# Altium PCB NanoEEG_v2_MCU.PcbDoc (part 2 of 2)
Units mil, origin at the board's own origin, x right, y up, seen from the top; angles counter-clockwise.
Board outline 2598.43 x 2047.24 mil, 4 copper layers (Top Layer, Gound Plane 1, Power Layer 1, Bottom Layer), stack 73.627 mil thick; 74 components, 82 nets, 371 pads, 188 vias.
Unrouted connection lines stored in the file: 22.
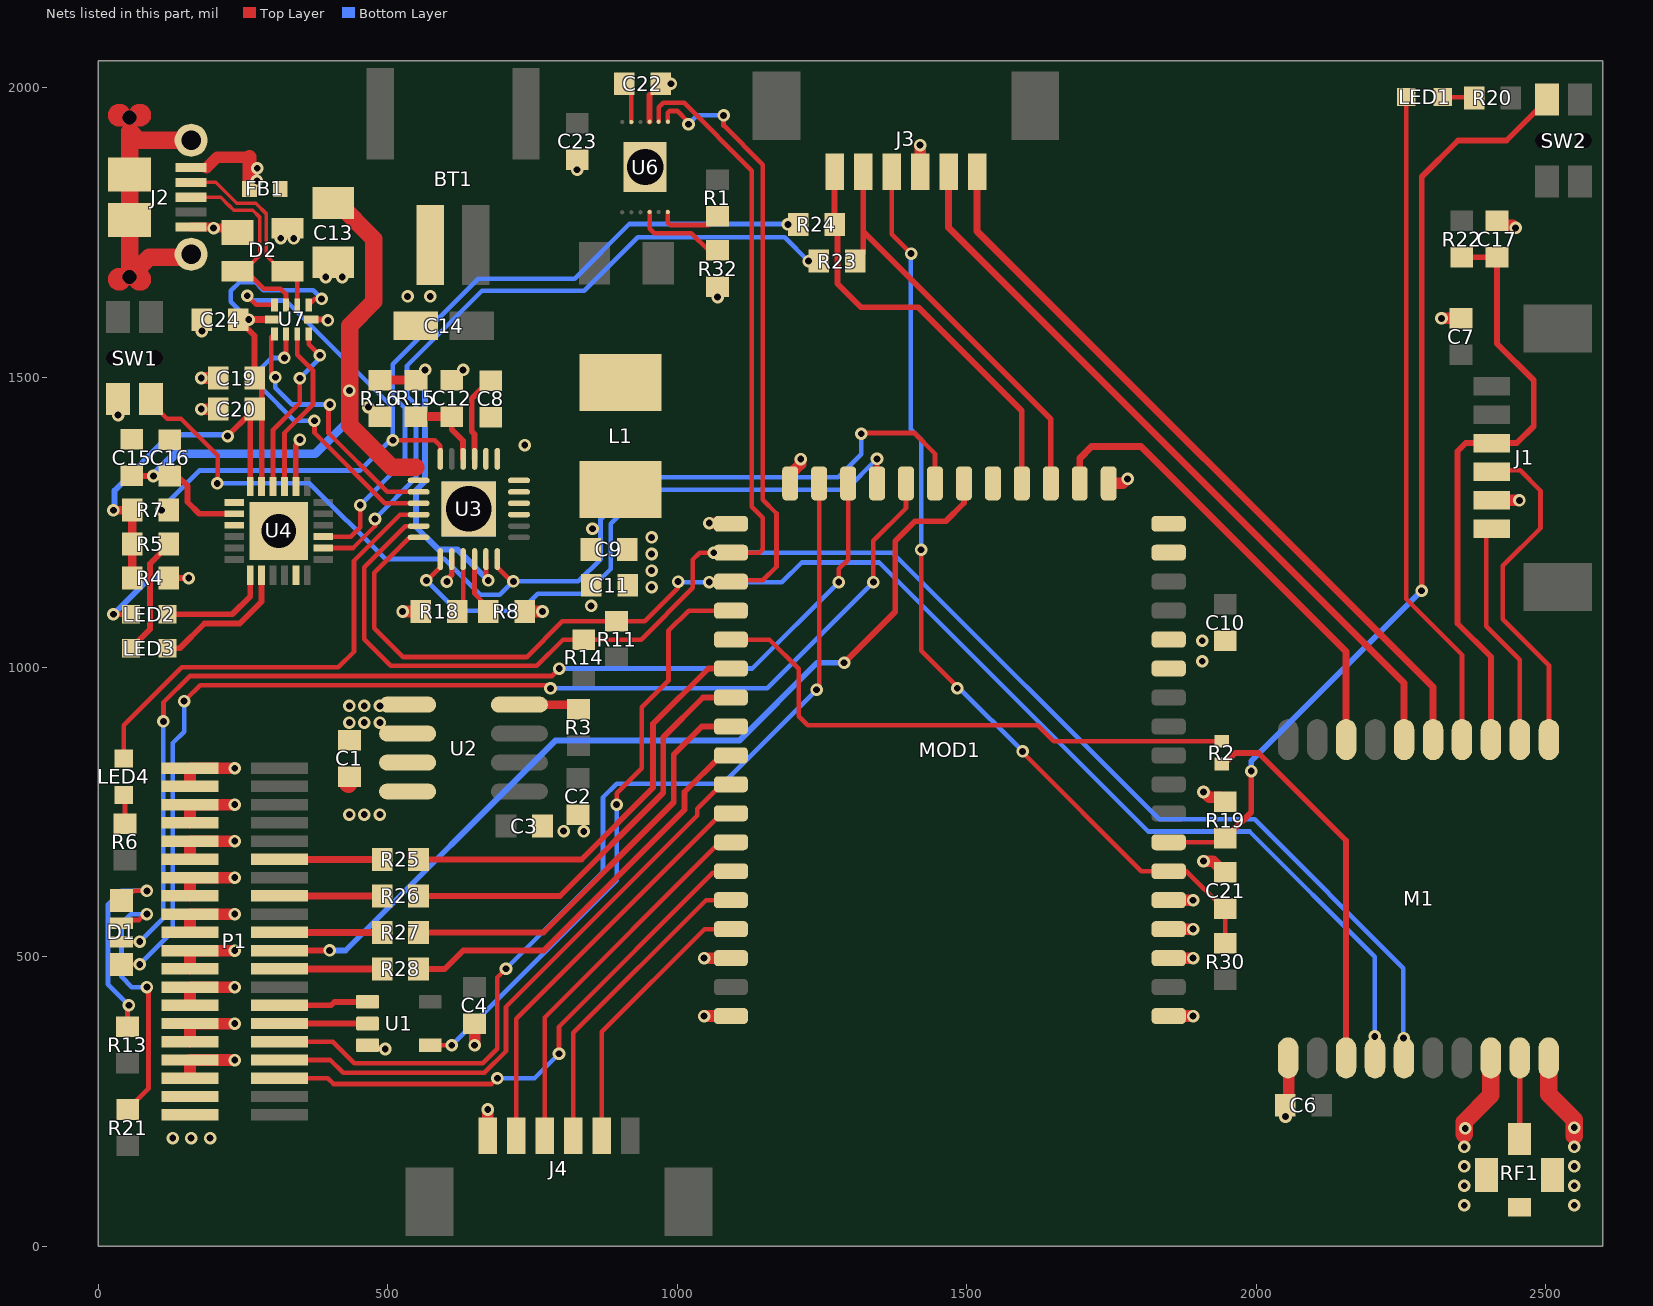
[diagram p4: the nets of this part, all layers, seen from the top]

## Via types
v1: diameter 21.65, hole 11.81, Top Layer to Bottom Layer, tented both sides, 182 vias
v2: diameter 157.48, hole 78.74, Top Layer to Bottom Layer, 3 vias
v3: diameter 78.74, hole 59.06, Top Layer to Bottom Layer, tented both sides, 1 vias
v4: diameter 59.06, hole 51.18, Top Layer to Bottom Layer, tented both sides, 1 vias
v5: diameter 47.24, hole 35.43, Top Layer to Bottom Layer, tented both sides, 1 vias

## Nets (pads, with @x,y where several pads share a name; then routed paths per layer and width w, separated by ;. In a path a pad name is that pad's centre, name@x,y a point inside that pad or via, vN(x,y) a via of type N, cw(c..) or ccw(c..) an arc to the next point about the centre after c; other vN are vias at no path point) (continued)
BQ_CHARGE_STAT: LED4.1 U3.4 | length 809
  Top Layer w8: LED4.1@44.67,842.11 44.67,899.51 144.64,999.48 414.89,999.48 442.06,1026.66 442.06,1183.67 521.48,1263.08 U3.4@553.72,1263.08
BQ_D+: U3.2 U7.1 | length 450.3
  Top Layer w8: U7.1@304.9,1575.02 299.29,1569.42 299.29,1507.33 v1(306.37,1500.25) ; v1@397.95,1452.36 397.95,1404 499.51,1302.45 U3.2@553.72,1302.45
  Bottom Layer w8: v1(306.37,1500.25) 306.37,1482.25 335.46,1453.16 v1(400.39,1453.16)
BQ_D-: U3.3 U7.2 | length 489.5
  Top Layer w8: v1(321.74,1533.62) 324.58,1536.46 U7.2@324.58,1575.02 ; v1@373.77,1424.93 373.77,1404.36 495.38,1282.76 U3.3@553.72,1282.76
  Bottom Layer w8: v1(321.74,1533.62) 299.49,1533.62 282.3,1516.43 282.3,1481.85 338.98,1425.17 v1(373.73,1425.17)
BQ_DSEL: R7.2 U3.24 U7.9 | length 1005.1
  Top Layer w8: v1(257.82,1640.92) 273.53,1625.22 U7.9@304.9,1625.22 ; v1(509.22,1391.65) 581.36,1391.65 591.12,1381.89 U3.24@591.12,1359.54
  Top Layer w10: R7.2@121.9,1269.05 R7.2@121.9,1271.02
  Bottom Layer w8: v1@108.03,1272.15 175.08,1339.2 452.25,1339.2 503.8,1390.76 503.8,1388.73 506.72,1391.65 v1(509.22,1391.65) 509.22,1448.11 324.6,1632.73 266.01,1632.73 v1(257.82,1640.92)
  other v1: 109.53,1270.66
BQ_INT: MOD1.27 U3.7 | length 1045.9
  Top Layer w8: v1(567.01,1149.51) 568.2,1149.51 591.12,1172.42 U3.7@591.12,1186.31 ; v1(1345.08,1359.35) 1345.08,1321.32 1343.01,1319.25 MOD1.27@1345.22,1317.04
  Bottom Layer w8: v1(567.01,1149.51) 619.41,1097.11 729.65,1097.11 759.28,1126.74 842.52,1126.74 885.08,1169.3 885.08,1247.65 943.46,1306.03 1291.75,1306.03 v1(1345.08,1359.35)
BQ_nCE: R18.1 U3.9 | length 94.6
  Top Layer w8: R18.1@620.47,1095.87 630.49,1105.89 U3.9@630.49,1186.31
BQ_nQON: MOD1.25 SW1.1' U3.12 | length 1823.6
  Top Layer w8: SW1.1'@91.79,1462.51 95.65,1462.51 99.25,1458.9 99.25,1448.82 119.17,1428.9 143.27,1428.9 206.96,1365.21 v1@206.96,1317.01 ; U3.12@689.54,1186.31 689.54,1171.89 713.67,1147.77 v1(717.2,1147.77) ; v1@1317.44,1404.15 1409.41,1404.15 1445.22,1368.34 MOD1.25@1445.22,1317.04
  Bottom Layer w8: v1@205.98,1317.49 365.11,1317.49 496.01,1186.6 597.76,1186.6 659.83,1124.53 693.96,1124.53 v1(717.2,1147.77) 829.33,1147.77 867.76,1186.2 867.76,1255.24 940.41,1327.89 1278.14,1327.89 1317.8,1367.55 v1(1317.8,1402.72)
  other v1: 205.98,1317.01
BQ_REGN: C12.1 R15.1 U3.22 | length 143.1
  Top Layer w10: C12.1@610.8,1432.42 610.8,1409.99 630.21,1390.58 630.21,1359.81 U3.22@630.49,1359.54
  Top Layer w16: R15.1@548.74,1432.42 C12.1@610.8,1432.42
CBS_ACCEL: MOD1.17
CC1310_nRESET: C17.2 J1.4 M1.3 R22.1 | length 1049.4
  Top Layer w10: R22.1@2354.81,1707.43 C17.2@2415.41,1707.43 2415.41,1558.66 2478.94,1495.13 2478.94,1415.82 2449.72,1386.61 2361.84,1386.61 2347.64,1372.41 2347.64,1075.28 2405.17,1017.74 M1.3@2405.17,874.61
CC1310_Sync_PWM: MOD1.35 R2.2 | length 986.6
  Top Layer w8: MOD1.35@1074.2,1047.36 MOD1.35@1092.85,1047.36 1159.46,1047.36 1209.86,996.95 1209.86,915.29 1225.82,899.34 1622.8,899.34 1650.22,871.92 R2.2@1940.26,871.92
CC1310_TCKC: J1.1 M1.2 | length 391.4
  Top Layer w8: J1.1@2406.28,1238.37 2397.34,1229.43 2397.34,1070.52 2455.17,1012.68 M1.2@2455.17,874.61
CC1310_TMSC: J1.3 M1.1 | length 593.3
  Top Layer w8: J1.3@2406.28,1336.79 2406.28,1338.62 2405.12,1339.78 2455.45,1339.78 2490.73,1304.5 2490.73,1239.65 2425.87,1174.8 2425.87,1082.45 2505.32,1003 M1.1@2505.32,874.61
CC1310_UART_RX: J3.1 M1.5 | length 1306.2
  Top Layer w12: J3.1@1518.03,1854.76 1518.03,1752.47 2305.17,965.32 M1.5@2305.17,874.61
CC1310_UART_TX: J3.2 M1.6 | length 1305.9
  Top Layer w12: J3.2@1468.82,1854.76 1468.82,1758.63 2255.17,972.27 M1.6@2255.17,874.61
CC1310_WAKEUP: M1.8 MOD1.20 | length 810.2
  Top Layer w12: MOD1.20@1695.22,1317.04 1695.22,1360.13 1715.73,1380.65 1801.08,1380.65 2155.17,1026.56 M1.8@2155.17,874.61
CC3235_JTAG_TCK: J4.4 MOD1.44 | length 544.8
  Top Layer w8: J4.4@820.6,190.54 820.6,368.18 1049.79,597.36 MOD1.44@1092.85,597.36
CC3235_JTAG_TDI: J4.2 MOD1.41 | length 719.6
  Top Layer w8: J4.2@722.18,190.54 722.18,392.43 1077.11,747.36 MOD1.41@1092.85,747.36
CC3235_JTAG_TDO: J4.3 MOD1.42 | length 651.1
  Top Layer w8: J4.3@771.39,190.54 771.39,394.84 1072.96,696.41 1091.9,696.41 MOD1.42@1092.85,697.36
CC3235_JTAG_TMS: J4.5 MOD1.45 | length 475.9
  Top Layer w8: J4.5@869.82,190.54 869.82,369.92 1047.26,547.36 MOD1.45@1092.85,547.36
CC3235_MODE02: MOD1.7 R19.2 SW2.1' | length 1658.7
  Top Layer w8: MOD1.7@1848.76,697.36 1939.66,697.36 R19.2@1946.54,704.24
  Top Layer w10: R19.2@1946.54,704.24 1991.41,749.12 v1(1991.41,820.31) ; v1@2284.95,1131.51 2285.54,1132.1 2285.54,1846.4 2348.23,1909.1 2432.03,1909.1 SW2.1'@2502.85,1979.92 ; SW2.1'@2502.05,1979.92 SW2.1'@2502.85,1979.92 ; SW2.1'@2504.1,1981.17 SW2.1'@2502.85,1979.92
  Bottom Layer w10: v1(1991.41,820.31) 1991.41,837.62 v1(2285.42,1131.62)
CC3235_nRST: C21.2 J3.4 MOD1.6 R30.1 | length 1620.5
  Top Layer w8: J3.4@1370.39,1854.76 1370.39,1747.45 v1(1404.09,1713.75) ; v1(1421.23,1202.55) 1421.23,1028.23 1483.62,965.84 v1(1483.62,963.43) ; v1(1596.5,854.34) 1596.5,852.44 1801.59,647.36 MOD1.6@1848.76,647.36 1879.43,647.36 1944.57,582.22 C21.2@1946.54,582.22 R30.1@1946.54,522.69
  Bottom Layer w8: v1(1404.09,1713.75) 1403.12,1712.77 1403.12,1410.85 1421.23,1392.74 v1(1421.23,1202.55) ; v1(1483.62,963.43) 1487.41,963.43 v1(1596.5,854.34)
CC3235_UART_RX: J3.6 MOD1.22 R24.1 | length 729.6
  Top Layer w10: J3.6@1271.97,1854.76 R24.1@1271.95,1764.12 1276.65,1759.41 1276.65,1662.28 1317.58,1621.36 1416.46,1621.36 1595.22,1442.6 MOD1.22@1595.22,1317.04
CC3235_UART_TX: J3.5 MOD1.21 R23.1 | length 735.6
  Top Layer w10: R23.1@1307.71,1700.99 1321.18,1714.46 1321.18,1752.13 ; J3.5@1316.25,1849.83 J3.5@1321.18,1854.76 1321.18,1752.13 ; MOD1.21@1645.22,1317.04 1645.22,1428.1 1321.18,1752.13
CoP_LED1: LED1.1 M1.4 | length 1149.2
  Top Layer w8: LED1.1@2259.14,1984.05 2259.14,1117.44 2355.17,1021.41 M1.4@2355.17,874.61
CP2102_RXD: R23.2 U4.20 | length 1205.4
  Top Layer w8: U4.20@404.62,1205.47 440.33,1205.47 478.29,1243.43 v1(478.29,1255.55)
  Bottom Layer w8: v1(478.29,1255.55) 478.29,1256.34 549.02,1327.06 549.02,1453.04 533.51,1468.54 533.51,1520.11 663.11,1649.71 839.78,1649.71 932.3,1742.23 1185.51,1742.23 v1@1227.64,1700.11
  other v1: 1227,1700.99
CP2102_RXT: LED2.1 U4.13 | length 176.3
  Top Layer w10: LED2.1@119.93,1091 231.93,1091 262.89,1121.96 U4.13@262.89,1142.48
CP2102_SUSPEND: U4.17
CP2102_TXD: R24.2 U4.21 | length 1170.3
  Top Layer w8: U4.21@404.62,1225.15 436.45,1225.15 452.75,1241.45 v1(452.75,1279.46)
  Bottom Layer w8: v1(452.75,1279.46) 530.05,1356.76 530.05,1447.09 509.22,1467.91 509.22,1522.84 656.93,1670.55 823.02,1670.55 917.35,1764.88 1200.46,1764.88 v1@1201.82,1763.52
  other v1: 1191.24,1764.12
CP2102_TXT: LED3.1 U4.14 | length 225.7
  Top Layer w10: LED3.1@119.93,1032.31 140.99,1032.31 183.69,1075 244.87,1075 282.5,1112.62 282.5,1142.4 U4.14@282.57,1142.48
CP2102_VDD: C19.2 C20.2 C24.2 R4.2 R5.2 R7.1 U4.5 U4.6 U7.6 U7.10 | length 1212.4
  Top Layer w8: U7.6@363.95,1628.84 U7.6@363.95,1625.22 374.26,1635.53 384.41,1635.53 v1(386.08,1635.53)
  Top Layer w10: v1(223.65,1398.73) 223.76,1398.73 C20.2@262.89,1437.86 ; C24.2@242.5,1599.75 270.31,1571.94 C19.2@270.31,1499.01 282.57,1486.74 U4.5@282.57,1327.52 ; U4.6@262.89,1327.52 C20.2@262.89,1437.86 ; C20.2@270.31,1445.28 C20.2@262.89,1437.86
  Top Layer w12: C24.2@242.5,1599.75 v1(260.21,1599.75) 300.2,1599.75 U7.10@300.57,1600.12
  Top Layer w15: v1(26.55,1270.66) 26.73,1270.84 58.37,1270.84 58.91,1270.3 R5.2@58.91,1212.33 R4.2@58.91,1153.63
  Bottom Layer w8: v1(260.21,1599.75) 229.27,1630.7 229.27,1649.57 244.48,1664.77 271.09,1664.77 285.57,1650.29 371.32,1650.29 v1(386.08,1635.53)
  Bottom Layer w10: v1@28.72,1269.79 28.72,1304.92 124.7,1400.9 v1@223.22,1400.9
  Bottom Layer w15: v1(26.55,1270.66) 27.86,1270.66 v1@28.72,1269.79
CP_D+: U4.3 U7.3 | length 279.2
  Top Layer w8: U4.3@321.94,1327.52 321.94,1404.05 371.31,1453.42 371.31,1511.91 344.27,1538.96 U7.3@344.27,1575.02
CP_D-: U4.4 U7.4 | length 289
  Top Layer w8: U4.4@302.26,1327.52 302.26,1409.56 348.62,1455.93 v1(348.62,1498.58) ; U7.4@363.95,1575.02 363.95,1557.57 v1(383.21,1538.31)
  Bottom Layer w8: v1(348.62,1498.58) 383.21,1533.16 v1(383.21,1538.31)
CSB_GYRO: MOD1.18
D+: D2.2 J2.3 U7.8 | length 356.2
  Top Layer w6: J2.3@160.81,1811.13 211.68,1811.13 225.12,1797.69 225.31,1797.69 234.43,1788.56 267.43,1788.56 278.91,1777.08 278.91,1710.57 D2.2@251.52,1683.18 ; D2.2@240.86,1683.18 D2.2@251.52,1683.18 ; D2.2@256.13,1683.18 D2.2@251.52,1683.18
  Top Layer w8: D2.2@256.13,1683.18 285.85,1653.45 315.09,1653.45 324.58,1643.96 U7.8@324.58,1625.22
D-: D2.3 J2.2 U7.7 | length 337.6
  Top Layer w6: J2.2@160.81,1836.72 203.25,1836.72 239.4,1800.56 272.62,1800.56 290.91,1782.27 290.91,1709.89 D2.3@317.63,1683.18
  Top Layer w8: D2.3@317.63,1683.18 D2.3@327.47,1683.18 344.27,1666.38 U7.7@344.27,1625.22
GND: BT1.2 C1.1 C2.1 C3.1 C4.1 C6.1 C7.1 C9.1 C10.1 C11.1 C12.2 C13.2 C14.2 C15.2 C16.2 C17.1 C19.1 C20.1 C21.1 C22.1 C23.1 C24.1 D2.1 J1.2 J2.5 J2.6 J2.7 J2.8 J2.9 J2.10 J2.11 J3.3 J4.1 M1.11 M1.18 M1.20 MOD1.1 MOD1.3 MOD1.4 MOD1.5 MOD1.13 MOD1.14 MOD1.19 MOD1.30 MOD1.31 MOD1.46 MOD1.48 P1.5 P1.7 P1.9 P1.11 P1.13 P1.15 P1.17 P1.19 P1.21 P1.23 P1.25 P1.27 P1.29 P1.31 P1.33 P1.35 P1.37 P1.39 R8.1 R16.2 R18.2 R19.1 R32.2 RF1.2 RF1.3 RF1.4 SW1.2' U1.3 U2.1 U2.2 U3.8 U3.17 U3.18 U3.25 U4.2 U4.25 U6.3 U6.13 U7.5 | length 3077.3
  Top Layer w10: 54.51,1924.79 J2.8@54.51,1948.93 ; J2.11@62.62,1671.53 J2.11@62.62,1681.44 ; J2.6@153.68,1916.68 J2.6@160.81,1909.56 ; J2.7@160.81,1712.7 J2.7@164.72,1712.7 ; J2.5@160.81,1759.95 J2.5@161.02,1759.95 ; U4.2@341.63,1327.52 341.63,1382.63 348.63,1389.64 v1(348.63,1392.79) ; U7.5@368.28,1600.12 395.49,1600.12 v1(397.09,1598.53) ; U1.3@469.29,346.97 473.59,342.66 493.7,342.66 v1(495.93,340.43) ; v1(602.44,1147.56) 602.44,1150.72 610.8,1159.08 U3.8@610.8,1186.31 ; U6.3@952.4,1941.52 952.4,1987.89 C22.1@971.56,2007.04 ; M1.11@2055,325 2055,307.36 M1.11@2055.72,306.64
  Top Layer w16: J2.5@161.02,1759.95 161.14,1759.82 197.73,1759.82 v1(199.57,1757.98) 232.98,1757.98 D2.1@240.86,1750.11
  Top Layer w20: P1.5@158.86,289.88 P1.7@158.86,321.38 ; P1.9@158.86,352.87 P1.11@158.86,384.37 ; P1.13@158.86,415.86 P1.15@158.86,447.36 ; P1.17@158.86,478.86 P1.19@158.86,510.35 ; P1.21@158.86,541.85 P1.23@158.86,573.34 ; P1.25@158.86,604.84 P1.27@158.86,636.34 ; P1.29@158.86,667.83 P1.31@158.86,699.33 v1(236.22,699.32) ; P1.33@158.86,730.82 P1.35@158.86,762.32 v1(236.22,762.31) ; P1.37@158.86,793.82 P1.39@158.86,825.31 v1(236.22,825.31) ; P1.7@158.86,321.38 v1@236.2,321.35 ; P1.11@158.86,384.37 v1@236.2,384.35 ; P1.15@158.86,447.36 v1@236.2,447.34 ; P1.19@158.86,510.35 v1@236.21,510.34 ; P1.23@158.86,573.34 v1@236.21,573.33 ; P1.27@158.87,636.33 v1(236.22,636.32) ; v1(178.31,1445.28) C20.1@207.31,1445.28 ; v1(178.31,1499.01) C19.1@207.31,1499.01 ; v1(525.88,1095.87) R18.2@557.48,1095.87 ; v1(650.17,346.97) C4.1@650.17,384.37 ; J4.1@672.97,190.54 v1(672.97,235.96) ; R8.1@736.79,1095.87 v1(767.5,1095.87) ; v1(1046.54,397.36) MOD1.48@1092.85,397.36 ; v1(1046.54,497.36) MOD1.46@1092.85,497.36 ; v1(1055.53,1248.47) 1055.85,1248.16 1092.06,1248.16 MOD1.31@1092.85,1247.36 ; MOD1.30@1195.22,1317.04 1195.22,1332.79 1213.03,1350.6 1213.03,1358.81 v1(1213.34,1359.13) ; J3.3@1419.61,1854.76 v1(1419.61,1901.07) ; MOD1.19@1745.22,1317.04 1769.72,1317.04 1777.38,1324.7 v1(1777.83,1324.7) ; MOD1.1@1848.76,397.36 v1(1890.95,397.36) ; MOD1.3@1848.76,497.36 v1(1890.95,497.36) ; MOD1.4@1848.76,547.36 v1(1890.95,547.36) ; MOD1.5@1848.76,597.36 v1(1890.95,597.36) ; v1(1908.86,664.85) 1909.17,664.53 1925.25,664.53 1942.42,647.36 1944.39,647.36 C21.1@1946.54,645.21 ; v1(1908.86,784.14) 1909.3,784.14 1918.5,774.95 1938.82,774.95 R19.1@1946.54,767.23 ; C6.1@2050.42,243.35 2055.72,248.65 M1.11@2055.72,306.64 ; v1(2319.82,1601.91) C7.1@2353.74,1601.91 ; J1.2@2406.28,1287.58 v1(2454.39,1287.58) ; C17.1@2415.41,1770.43 2423.53,1770.43 2423.53,1764.27 2425.1,1762.71 2442.62,1762.71 2447.25,1758.08 v1(2447.7,1758.08) v1@2448.02,1757.76
  Top Layer w30: J2.7@160.81,1712.7 155.62,1707.52 88.7,1707.52 62.62,1681.44 J2.11@54.51,1673.33 J2.10@54.51,1771.76 J2.9@54.51,1850.5 54.51,1924.79 69.74,1909.56 J2.6@160.81,1909.56 ; v1@2359.02,193.27 2359.02,214.38 2405,260.36 M1.18@2405,325 ; M1.20@2504.93,325 2504.93,262.42 2549.33,218.02 2549.33,190.29
  other v1: 2359.19,70.74 2548.92,70.74 2359.19,104.24 2548.92,104.24 2359.19,137.75 2548.92,137.75 2359.19,171.25 2548.92,171.25 2360.82,203.43 2548.92,204.76 2050.42,223.67 236.22,321.33 236.22,384.33 236.22,447.33 236.22,510.32 236.22,573.32 838.67,716.05 803.88,716.57 434.21,904.07 459.84,904.07 486.68,904.07 434.21,932.91 459.84,932.91 486.67,932.91 1906.83,1009.96 1906.83,1045.24 851.49,1105.55 853.85,1238.67 736.79,1383.27 34.7,1434.95 466.98,1448.83 630.49,1513.1 179.5,1580.07 1069.94,1638.69 534.66,1640.02 573.79,1640.02 393.37,1673.33 421.62,1673.33 827.36,1858.52 989.27,2007.04
  other v3: 312.1,1235
I2C_SCL_B: M1.15 MOD1.32 R14.2 U3.5 U6.2 | length 3572.8
  Top Layer w8: U3.5@553.72,1243.39 553.44,1243.12 530.4,1243.12 459.84,1172.56 459.84,1047.77 505.47,1002.14 757.67,1002.14 802.89,1047.36 R14.2@838.67,1047.36 937.87,1047.36 1027.22,1136.7 1027.22,1185.7 1038.88,1197.36 v1(1063.33,1197.36) MOD1.32@1092.85,1197.36 1142.18,1197.36 1147.97,1203.15 1147.97,1258 1129.06,1276.91 1129.06,1857.11 1012.04,1974.14 976.1,1974.14 968.15,1966.19 U6.2@968.15,1941.52
  Bottom Layer w8: v1(1063.33,1197.36) 1371.87,1197.36 1832.15,737.08 1997.05,737.08 2254,480.14 v1@2254,361.25
  other v1: 2254.48,359.33
I2C_SDA_B: M1.14 MOD1.33 R11.2 U3.6 U6.1 | length 3518.6
  Top Layer w8: U3.6@553.72,1223.71 538.37,1223.71 477.21,1162.55 477.21,1067.12 527.15,1017.18 740.13,1017.18 801.81,1078.86 R11.2@895.53,1078.86 943.93,1078.86 1000.97,1135.9 v1@1000.97,1147.36 ; U6.1@983.9,1941.52 983.9,1956.93 987.11,1960.14 999.83,1960.14 1019.63,1940.34 v1(1019.63,1937.1) ; v1@1052.74,1143.72 v1@1055.4,1141.07 ; v1(1055.53,1146.51) 1092.85,1146.51 1095.85,1149.51 1147.97,1149.51 1171.57,1173.11 1171.57,1265.02 1147.97,1288.63 1147.97,1867.29 1080.15,1935.12 v1(1080.15,1952.53)
  Bottom Layer w8: v1(1001.63,1147.36) 1002.48,1146.51 v1(1055.53,1146.51) 1055.98,1146.05 1180.75,1146.05 1215.14,1180.44 1348.86,1180.44 1813.3,716 1988.24,716 2204.64,499.59 v1(2204.64,362.09) ; v1(1019.63,1937.1) 1035.06,1952.53 v1(1080.15,1952.53)
INT2_ACCEL: MOD1.23
MOD1_NDRDY: P1.12 U1.2 | length 155.7
  Top Layer w10: P1.12@313.58,384.37 U1.2@469.29,384.37
Mod2_nCS: MOD1.24 P1.20 | length 1607.3
  Top Layer w10: P1.20@313.58,510.35 399.6,510.35 v1(399.86,510.61) ; v1(1288.36,1007.23) 1376.53,1095.39 1376.53,1217.79 1410.56,1251.82 1463.9,1251.82 1495.22,1283.14 MOD1.24@1495.22,1317.04
  Bottom Layer w10: v1(399.86,510.61) 427.34,510.61 789.6,872.87 1107.09,872.87 1241.45,1007.23 v1(1288.36,1007.23)
MOD2_NDRDY: P1.14 U1.1 | length 158.1
  Top Layer w10: P1.14@313.58,415.86 402.33,415.86 408.23,421.77 U1.1@469.29,421.77
MOD_MISO: P1.26 R26.2 | length 178.7
  Top Layer w12: P1.26@314.9,603.52 P1.26@313.58,604.84 490.33,604.84 R26.2@490.43,604.74
MOD_MOSI: P1.22 R27.2 | length 177.4
  Top Layer w12: P1.22@313.9,542.17 P1.22@313.58,541.85 490.24,541.85 R27.2@490.43,541.66
MOD_NCS: P1.18 R28.2 | length 177.2
  Top Layer w12: P1.18@313.73,478.71 P1.18@313.58,478.86 490.14,478.86 R28.2@490.43,478.57
Mod_nDRDY: MOD1.34 U1.4 | length 1064.8
  Top Layer w8: U1.4@569.68,346.97 576.51,353.79 U1.4@587.99,353.79 ; U1.4@585.75,346.97 U1.4@573.62,346.97 573.7,346.89 610.72,346.89 v1(610.8,346.81) ; v1(895.53,762.32) 895.53,781.72 939.12,825.31 939.12,930.21 984.98,976.07 984.98,1062.49 1019.85,1097.36 1072.67,1097.36 1074.16,1095.87 1075.65,1097.36 MOD1.34@1092.85,1097.36
  Bottom Layer w8: v1(610.8,346.81) 895.53,631.53 v1(895.53,762.32)
MOD_NPWDN: MOD1.40 P1.8 | length 1046.7
  Top Layer w8: P1.8@313.58,321.38 401.18,321.38 423.42,299.13 667.3,299.13 704.51,336.34 704.51,413.13 1034.95,743.56 1034.95,755.2 1077.11,797.36 MOD1.40@1092.85,797.36
MOD_NRESET: MOD1.43 P1.6 | length 964.6
  Top Layer w8: P1.6@313.58,289.88 396.86,289.88 406.67,280.07 679.73,280.07 v1(689.54,289.88) ; v1(796,332.17) 796,379.04 1061.54,644.58 1072.76,644.58 1072.76,647.36 MOD1.43@1092.85,647.36
  Bottom Layer w8: v1(689.54,289.88) 753.71,289.88 v1(796,332.17)
MOD_SCLK: P1.30 R25.2 | length 177
  Top Layer w12: P1.30@313.67,667.92 P1.30@313.58,667.83 R25.2@490.43,667.83
MOD_START: MOD1.29 P1.10 | length 1714.9
  Top Layer w8: P1.10@313.58,352.87 405.69,352.87 442.68,315.88 664.25,315.88 689.54,341.17 689.54,463.89 702.55,476.9 v1@702.55,478.86 ; v1@1241.77,959.78 1245.22,963.22 MOD1.29@1245.22,1317.04
  Bottom Layer w8: v1(704.51,478.86) 872,646.35 872,775.02 895.53,798.54 1078.83,798.54 v1(1240.92,960.63)
NetC8_1: C8.1 U3.21 | length 151.9
  Top Layer w10: U3.21@650.17,1359.54 650.17,1401.79 645.2,1406.77 645.2,1463.67 676.12,1494.59 C8.1@678.08,1494.59
NetC8_2: C8.2 L1.1 U3.19 U3.20 | length 11.6
  Top Layer w10: C8.2@669.86,1423.37 C8.2@678.08,1431.6
NetC22_2: C22.2 U6.5 | length 71
  Top Layer w8: C22.2@908.57,2007.04 920.91,1994.7 U6.5@920.91,1941.11
NetD1_2: D1.2 R21.2 | length 475.5
  Top Layer w8: D1.2@40.41,557.41 46.25,563.25 70.78,563.25 80.85,573.32 v1(84.54,573.32) ; D1.2@50.73,557.87 D1.2@52.35,556.26 ; R21.2@51.34,235.96 53.31,235.96 67.02,249.68 67.02,251.65 87.12,271.74 87.12,444.75 v1(84.54,447.33)
  Bottom Layer w8: v1(84.54,447.33) 58.57,447.33 40.68,465.22 40.68,557.74 56.26,573.32 v1(84.54,573.32)
NetD1_4: D1.4 R13.2 | length 355.4
  Top Layer w8: D1.4@40.41,596.78 56.1,612.46 60.71,612.46 61.72,613.47 v1(84.54,613.47) ; R13.2@50.73,378.99 R13.2@50.84,378.88 50.84,413.4 v1(53.31,415.86)
  Bottom Layer w8: v1(53.31,415.86) 17.18,451.99 17.18,589.98 40.68,613.47 v1(84.54,613.47)
NetIC?_12: 
NetLED1_2: LED1.2 R20.1 | length 54.7
  Top Layer w8: LED1.2@2322.13,1984.05 2374.84,1984.05 R20.1@2376.25,1982.64
NetLED2_2: LED2.2 R4.1 | length 221.5
  Top Layer w10: v1(26.55,1091) LED2.2@56.94,1091 ; R4.1@121.9,1153.63 v1(156.83,1153.63)
  Bottom Layer w10: v1(26.55,1091) 89.18,1153.63 v1(156.83,1153.63)
NetLED3_2: LED3.2 R5.1 | length 206.9
  Top Layer w10: LED3.2@56.94,1032.31 89.86,1065.23 89.86,1178.32 121.9,1210.36 R5.1@121.9,1212.33
NetLED4_2: LED4.2 R6.1 | length 52.4
  Top Layer w8: R6.1@44.67,729.55 R6.1@46.63,729.55 46.63,777.15 LED4.2@44.67,779.12
NetM1_13: M1.13 R2.1 | length 660.8
  Top Layer w10: R2.1@1940.26,832.55 1944.99,832.55 1964.07,851.63 2003.97,851.63 2155,700.6 M1.13@2155,325
NetM1_19: M1.19 RF1.1 | length 157
  Top Layer w10: RF1.1@2454.39,184.98 2455,185.59 M1.19@2455,325
  Top Layer w14: RF1.1@2454.39,168.26 RF1.1@2454.39,184.98
NetMOD1_36: MOD1.36 R25.1 | length 740.6
  Top Layer w10: R25.1@553.42,667.83 834.95,667.83 958.52,791.4 958.52,901.86 1054.02,997.36 MOD1.36@1092.85,997.36
NetMOD1_37: MOD1.37 R26.1 | length 737.6
  Top Layer w10: R26.1@553.42,604.74 797.89,604.74 976.01,782.86 976.01,878.92 1044.44,947.36 MOD1.37@1092.85,947.36
NetMOD1_38: MOD1.38 R27.1 | length 735.2
  Top Layer w10: R27.1@553.42,541.66 769.36,541.66 993.99,766.3 993.99,849.01 1042.34,897.36 MOD1.38@1092.85,897.36
NetMOD1_39: MOD1.39 R28.1 | length 710
  Top Layer w10: R28.1@553.42,478.57 598.74,478.57 630.52,510.35 769.54,510.35 1012.77,753.58 1012.77,784.07 1076.07,847.36 MOD1.39@1092.85,847.36
NetR7_1: U4.9
NetR8_2: R8.2 U3.10 | length 100.2
  Top Layer w8: U3.10@650.17,1186.31 650.17,1126.7 661.32,1115.56 661.32,1110.32 673.8,1097.84 R8.2@673.8,1095.87
NetR15_2: R15.2 R16.1 U3.11 | length 567.6
  Top Layer w8: v1@669.86,1149.54 U3.11@670.13,1186.03
  Top Layer w10: v1(673.8,1149.51) v1@673.8,1152.66
  Top Layer w16: R16.1@486.68,1495.41 R15.2@548.74,1495.41 565.55,1512.22 564.78,1512.99 v1(564.78,1513.1)
  Bottom Layer w10: v1(564.78,1513.1) 564.78,1320.88 549.02,1305.12 549.02,1241.69 587.56,1203.15 620.15,1203.15 v1(673.8,1149.51)
NetR?_2: 
PG_3.3VD: R3.1 U2.8 | length 105.4
  Top Layer w15: U2.8@727.58,935.03 821.93,935.03 R3.1@829.76,927.2
PGau_BIN: R32.1 U6.10 | length 161.7
  Top Layer w8: U6.10@952.4,1785.6 952.4,1757.03 960.49,1748.95 1024.65,1748.95 1054.19,1719.4 R32.1@1069.94,1719.4
PGau_OUT: R1.2 U6.12 | length 111.7
  Top Layer w8: U6.12@983.9,1785.6 983.9,1767.23 987.83,1763.31 1054.76,1763.31 R1.2@1069.52,1778.07
StatusLED_1: D1.3 MOD1.26 | length 1992.9
  Top Layer w8: D1.3@40.41,486.54 v1(72.23,486.54) ; v1(148.67,941.03) 152.36,941.03 152.36,944.72 176.26,968.62 773.43,968.62 v1@779.92,962.13 ; v1(1338.83,1146.51) 1338.83,1217.72 1395.22,1274.1 MOD1.26@1395.22,1317.04
  Bottom Layer w8: v1(72.23,486.54) 129.14,543.46 129.14,868.8 148.67,888.33 v1(148.67,941.03) ; v1(781.33,963.06) 1155.39,963.06 v1(1338.83,1146.51)
StatusLED_2: D1.1 MOD1.28 | length 1891.2
  Top Layer w8: D1.1@40.41,525.91 v1(72.23,525.91) ; v1(113.04,906.19) 113.04,939.25 158.16,984.37 783.53,984.37 v1(796.52,997.36) ; v1(1279.14,1146.51) 1279.14,1169.33 1295.22,1185.41 MOD1.28@1295.22,1317.04
  Bottom Layer w8: v1(72.23,525.91) 112.68,566.36 112.68,905.82 v1(113.04,906.19) ; v1(796.52,997.36) 1130,997.36 v1(1279.14,1146.51)
SYS_PWR: C1.2 C9.2 C11.2 L1.2 P1.1 P1.3 U2.3 U2.4 U3.15 U3.16 | length 1.9
  Top Layer w30: C1.2@431.28,798.54 C1.2@432.62,797.21
  other v1: 129.14,186.68 160.81,186.68 193.61,186.7 434.21,745.24 459.84,745.24 486.67,745.24 955.78,1137.98 955.78,1166.55 955.78,1195.13 955.78,1223.71
VBUS: C13.1 C15.1 C16.1 FB1.1 U3.1 U4.7 U4.8 | length 1210
  Top Layer w10: C15.1@61.06,1329.89 137.23,1329.89 154.34,1312.78 154.34,1285.06 174.88,1264.52 U4.8@219.58,1264.52
  Top Layer w30: C13.1@406.21,1801.29 414.09,1801.29 476.31,1739.07 476.31,1631.08 434.43,1589.21 434.43,1417.56 507.15,1344.85 548.74,1344.85
  Bottom Layer w15: v1(95.59,1329.8) 134.26,1368.46 375.33,1368.46 434.21,1427.34 v1(434.21,1477.35)
VBUS_IN: D2.4 FB1.2 J2.1 | length 145.5
  Top Layer w10: D2.4@321.6,1765.83 327.47,1759.95 D2.4@327.47,1757.98
  Top Layer w20: 187.38,1862.31 205.56,1880.48 261.79,1880.48
  Top Layer w24: FB1.2@261.79,1827.2 261.79,1880.48
  other v1: 315.49,1740.26 337.93,1740.06 274.38,1839.48 274.91,1861.21
pads on no net: BT1.0 J1.5 J1.MP1 J1.MP2 J2.4 J3.MP1 J3.MP2 J4.MP1 J4.MP2 M1.7 M1.9 M1.10 M1.16 M1.17 MOD1.2 MOD1.8 MOD1.9 MOD1.10 MOD1.11 MOD1.12 MOD1.47 P1.16 P1.24 P1.28 P1.32 P1.34 P1.36 P1.38 P1.40 SW1. SW1.1 SW1.2 SW2. SW2.1 SW2.2 U2.7 U3.23 U4.1 U4.10 U4.11 U4.12 U4.15 U4.16 U4.18 U4.19 U4.22 U4.23 U4.24 U6.4 U6.9 U6.11
copper on no net: | length 245.2
  Top Layer w10: 61.06,1392.88 149.04,1392.88 174.88,1367.05 174.88,1295.86 186.53,1284.21 219.58,1284.21
  other v1: 1035.06,1064.38
  other v2: 2125.98,118.11 354.33,1929.13 2125.98,1929.13
  other v4: 236.22,923.74
  other v5: 236.22,128.46

## Polygon pours and split planes (outlines as drawn)
3.3VD on Power Layer 1 "Power Layer 1-3.3VD" (solid, pour order 4): 2565.21,366.42 2565.21,2021.38 1052.24,2021.38 1052.24,1049.5 21.35,1049.5 21.35,977.86 22.03,977.86 22.03,23.17 1033.04,23.17 1033.04,366.66
no net on Power Layer 1 "Power Layer 1-No Net" (solid, pour order 2): 2598.13,366.42
GND on Gound Plane 1 (split plane): 2578.33,2027.15 2578.33,20.12 2020.8,20.11 2020.8,366.68 1067.42,366.68 1067.42,20.11 20.1,20.1 20.1,2027.15

## Keep-outs
Keep-Out Layer:
  lines w11.81: -21.02,0.02 -21.02,2047.24 2598.43,2047.24 2598.43,0.02 -21.02,0.02

## Other copper
Top Layer:
  rectangle: 1615.14,1717.38 1984.16,1826.21
  rectangle net BATT_IN: 676.15,1659.85 723.64,1797.66
  rectangle net BATT_IN: 994.2,1660.24 1020.36,1733.43
  rectangle net BATT_Gau_OUT: 606.81,1564.72 753.82,1613.59
  rectangle net BATT_Gau_OUT: 753.91,1565.02 804.68,1660.31
  rectangle net BATT_Gau_OUT: 753.91,1660.07 830.46,1733.43
  rectangle net GND: 2527.09,43.62 2567.99,220.08
  rectangle net GND: 2343.5,43.62 2385.83,220.08
  rectangle net GND: 833.1,1105.55 869.12,1237.54
  rectangle net GND: 726.95,1297.72 748.99,1391.65
  rectangle net GND: 413.36,864.21 589.74,947.36
  rectangle net GND: 2343.5,43.62 2567.99,83.1
  rectangle net GND: 1848.76,986.53 1961.64,1064.38
  rectangle net 3.3VD: 1848.76,1086.65 1961.64,1147.36
  rectangle net BATT_Gau_OUT: 753.26,1185.7 812.46,1223.71
  rectangle net BATT_Gau_OUT: 735.31,1218.98 812.49,1248.12
  rectangle net NetC8_2: 665.13,1366.05 694.27,1427.31
  rectangle net NetC8_2: 689.54,1413.88 973.33,1449.43
  rectangle net SYS_PWR: 895.86,1121.38 969.34,1276.91
  rectangle net SYS_PWR: 734.58,1258.35 851.49,1287.49
  rectangle net VBUS: 521.48,1317.41 567.01,1359.82
  rectangle net VBUS: 302.15,1786.29 441.65,1828.91
  rectangle net GND: 512.47,1563.57 589.74,1801.29
  rectangle net 3.3VD: 263.91,217.69 467.34,267.77
  rectangle net SYS_PWR: 109.68,174.01 208,267.77
  rectangle net SYS_PWR: 413.36,716.57 589.74,835.03
  rectangle net GND: 749.62,705.11 849.94,762.72
  rectangle net 3.3VD: 677.98,704.66 724.17,785.03
  rectangle net 3.3VD: 677.98,785.03 849.72,850.62
Power Layer 1:
  rectangle net BATT_IN: 664.8,1723.28 725.78,1752.13
  rectangle net BATT_IN: 664.41,1723.34 664.9,1723.84
  rectangle net BATT_IN: 664.9,1662.33 1019.47,1723.34
Bottom Layer:
  rectangle net VBUS_IN: 278.23,1727.71 350.38,1752.01
  rectangle net VBUS_IN: 261.28,1727.71 287.08,1874.11
  rectangle net BATT_Gau_OUT: 755.65,1183.99 813.78,1617.84
  rectangle net SYS_PWR: 286.85,716.57 525.88,775.75
  rectangle net SYS_PWR: 896.43,1017.99 970.67,1244.86
  rectangle net SYS_PWR: 286.85,1017.99 970.67,1075.5
  rectangle net SYS_PWR: 286.85,169.47 367.01,1075.5
  rectangle net SYS_PWR: 116.25,169.47 367.01,224.75
Gound Plane 1 (plane layer: these items are gaps in the copper):
  rectangle: 1067.42,0.23 2020.8,366.68
  lines w10: -3.82,1378.38 -3.66,1378.38

## Silkscreen, mask and mechanical layers (free items; w line width, h text height)
Top Overlay:
  rectangle: -196.85,1133.86 1.67,1535.43
  text "G" at 1430.37,1784.69 h30 r90
  text "STM_RX" at 1483.72,1636.47 h30 r90
  text "STM_TX" at 1531.68,1636.47 h30 r90
  text "3235_R" at 1381.85,1635.62 h30 r90
  text "3235_TX" at 1338.36,1469.33 h30 r90
  text "3" at 2308.34,1467.96 h30
  text "3235_RX" at 1289.62,1466.49 h30 r90
  text "R" at 2308.34,1370.51 h30
  text "IO" at 2308.34,1322.91 h30
  text "G" at 2308.34,1272.33 h30
  text "CK" at 2308.34,1221 h30
  text "SWD" at 2501.89,1064.38 h30 r270
  text "STM" at 2547.93,1064.38 h30 r270
  text "3" at 933.53,241.66 h30 r90
  text "G" at 687.17,240.44 h30 r90
  text "TDI" at 738.27,240.44 h30 r90
  text "TDO" at 787.7,240.44 h30 r90
  text "TCK" at 835.9,240.44 h30 r90
  text "TMS" at 884.96,241.05 h30 r90
  text "3235" at 394.37,62.5 h30
  text "JTAG" at 394.37,17.27 h30
Top Solder:
  text "NanoEEG_ADC_v2" at 1628.95,1787.78 h25
  text "Liu Miao 2021.1" at 1631.42,1732.22 h25
Mechanical 1:
  the board outline again, w11.81

## Text inside footprints (layer, text, board x,y; h text height)
J2: Mechanical 1 "PCB EDGE" at -48.5,2125.66 h20 r270